# Altium PCB BCM_ECU_revA_V2.PcbDoc (part 2 of 4)
Units mm, origin at the board's own origin, x right, y up, seen from the top; angles counter-clockwise.
Board outline 170 x 110 mm, 4 copper layers (TOP SIG, GND, PWR, BOT SIG), stack 0.603 mm thick; 422 components, 413 nets, 1412 pads, 185 vias.
Unrouted connection lines stored in the file: 642.
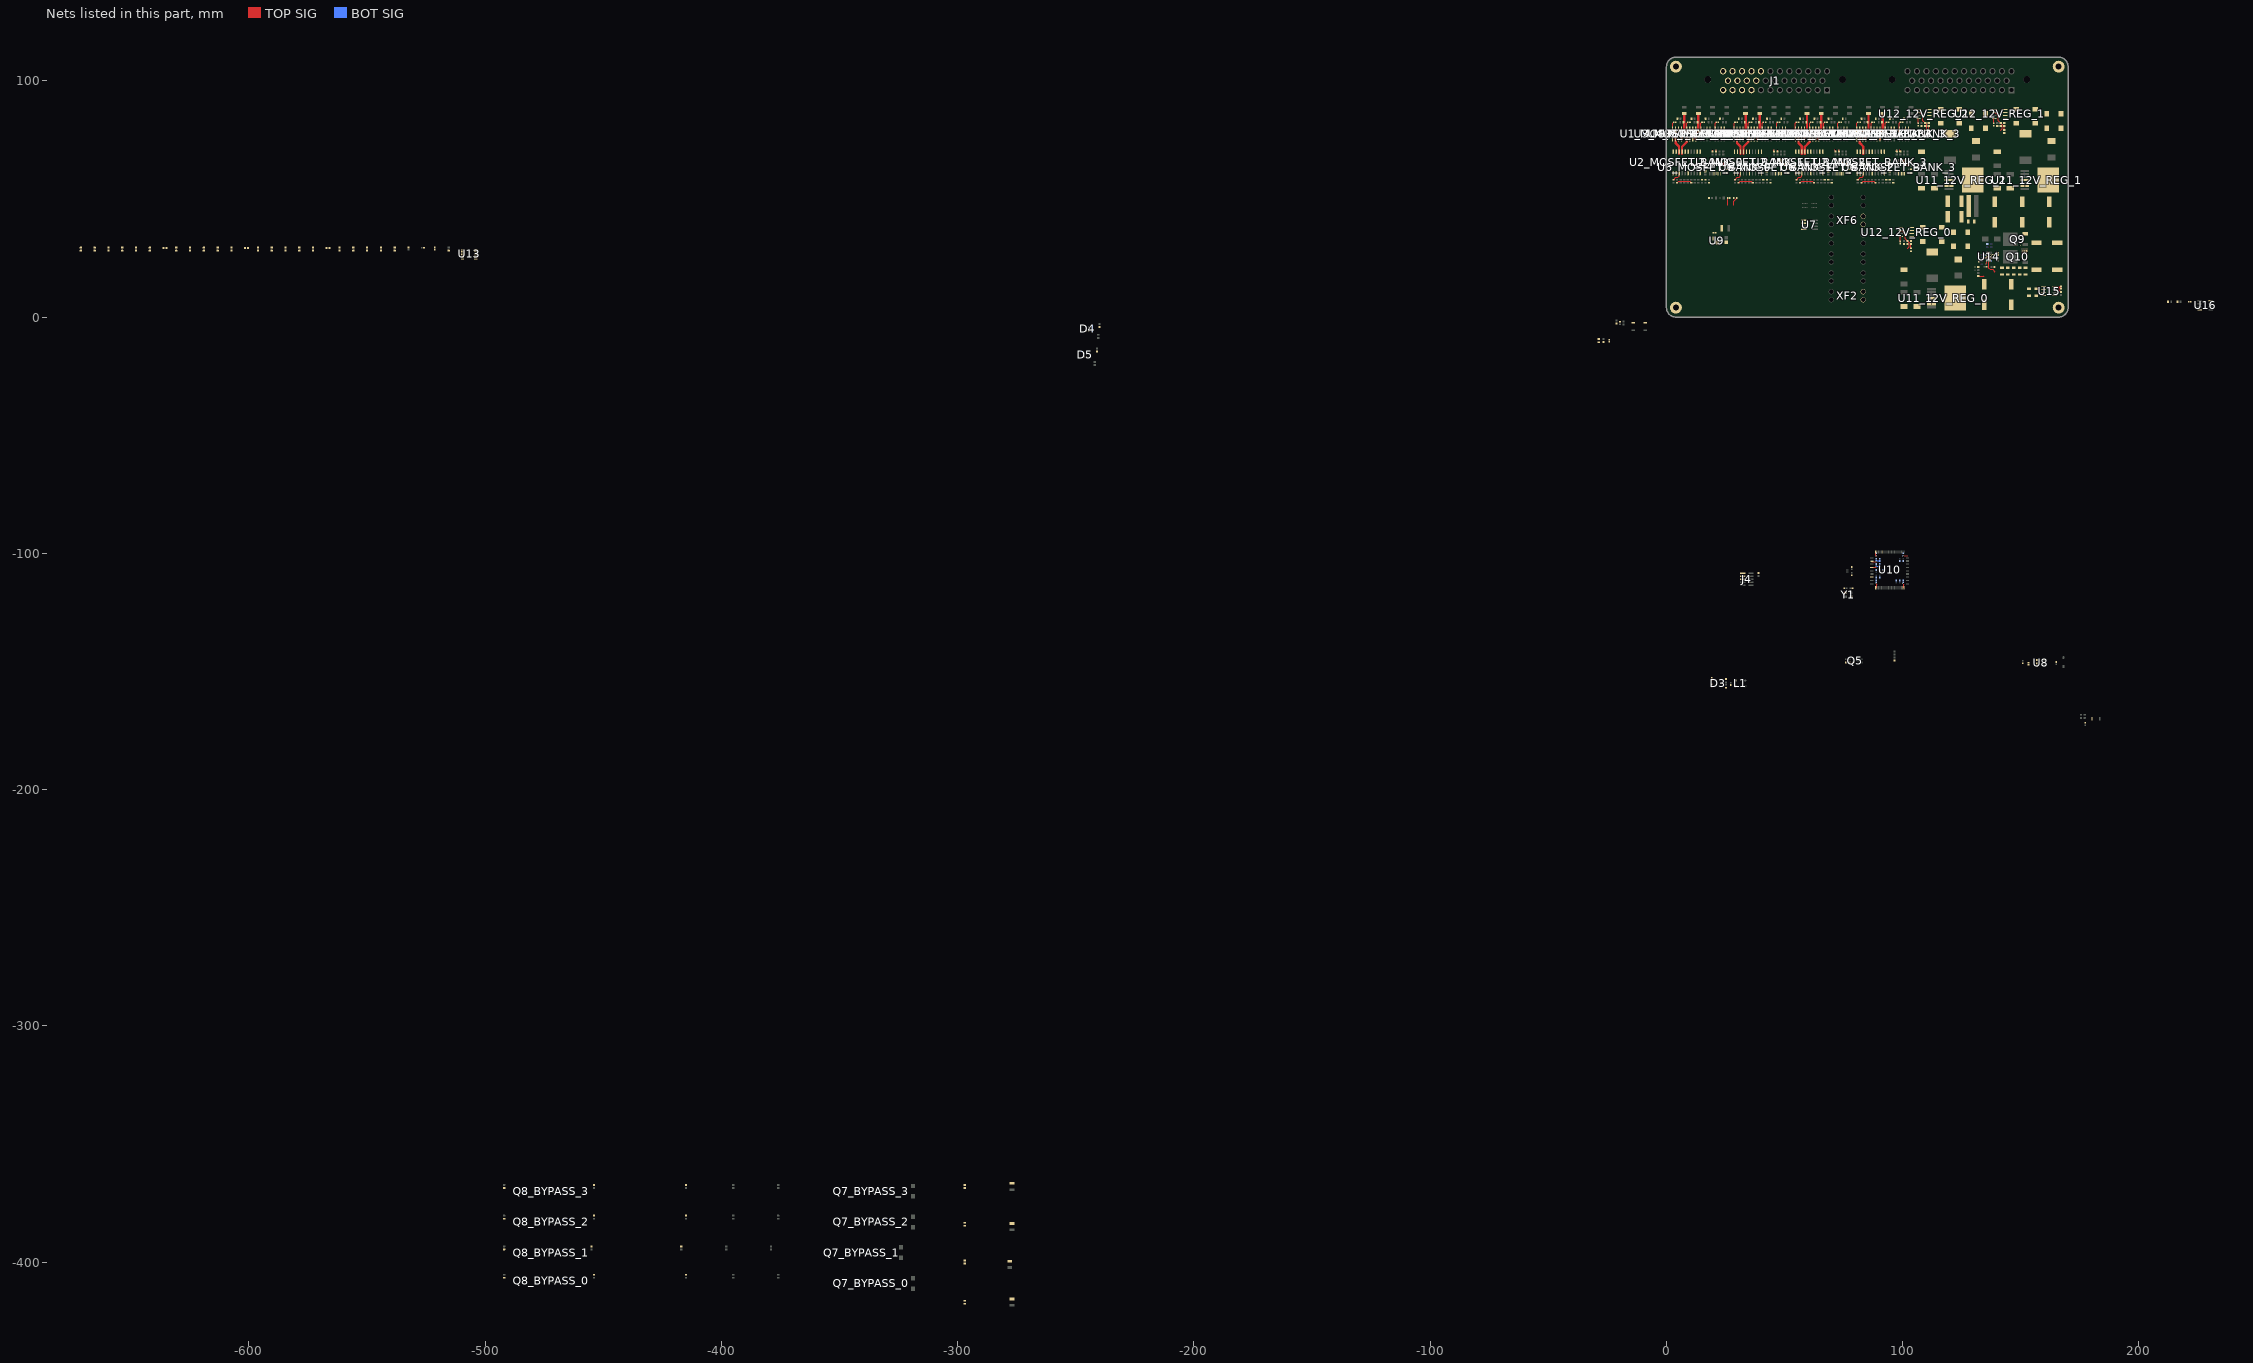
[diagram p3: the nets of this part, all layers, seen from the top]

## Footprints (in the part's own frame and the unit in brackets; to place one, negate y for a bottom-side part, rotate by r counter-clockwise, add the part's x,y. Pads: shape width x height; smd on the part's side, far side on the other; paste and mask are expansions set on the pad) (continued)
FP-SOD-123-IPC_A [mm]
  rect 1.308x0.762 smd paste+0 mask+0: 1(-1.825,0)
  rrect100% 1.308x0.762 smd paste+0 mask+0: 2(1.825,0)
  silkscreen extent -2.39,-0.8 1.35,1.01, body extent -2.98,-1.3 2.98,1.3, height 0.25
FP-SON6-P-0_50-MFG [mm]
  rect 0.3x0.45 smd paste+0 mask+0: 1(-0.5,-0.675) 2(0,-0.675) 3(0.5,-0.675) 4(0.5,0.675) 5(0,0.675) 6(-0.5,0.675)
  silkscreen extent -0.82,-1.58 0.82,0.08, body extent -0.92,-1 0.92,1, height 0.25
FP-SOT89-MFG [mm]
  rect 0.58x1.73 smd paste+0 mask+0: 1(-1.5,-1.635) 3(1.5,-1.635)
  round 1.74 smd paste+0 mask+0: 2(0,0.146)
  TOP SIG region: -0.38,-2.5 0.38,-2.5 0.38,-1 0.967,-1 0.967,2.03 -0.967,2.03 -0.967,-1 -0.38,-1 -0.38,-2.5
  silkscreen extent -2.3,-1.3 2.3,1.3, body extent -2.4,-2.6 2.4,2.13, height 0.25
FP-SOT323-3L-MFG [mm]
  rect 0.7x0.42 smd paste+0 mask+0: 1(-1,0.65) 2(-1,-0.65) 3(1,0)
  silkscreen extent -0.67,-1.1 0.67,1.1, body extent -1.45,-1.2 1.45,1.2, height 0.25
FP-SRF4532-MFG [mm]
  round 0.99 smd paste+0 mask+0: 1(-2.05,-1.25) 2(2.05,-1.25)
  round 0.97 smd paste+0 mask+0: 3(2.05,1.125) 4(-2.05,1.125)
  TOP SIG region: -2.6,0.45 -2.6,1.8 -1.5,1.8 -1.5,0.95 -1.9,0.45
  TOP SIG region: 1.5,1.8 2.6,1.8 2.6,0.45 1.9,0.45 1.5,0.95
  TOP SIG region: 1.5,-1.8 1.5,-0.95 1.9,-0.45 2.6,-0.45 2.6,-1.8
  TOP SIG region: -2.6,-1.8 -2.6,-0.45 -1.9,-0.45 -1.5,-0.95 -1.5,-1.8
  silkscreen extent -2.17,-2.47 1.12,1.7, body extent -2.7,-1.9 2.7,1.9, height 0.25
FP-SRP1265A-100M-MFG [mm]
  rect 3.1x5 smd paste+0 mask+0: 1(-5.55,0) 2(5.55,0)
  silkscreen extent -7,-6.4 7,6.4, body extent -7.2,-6.5 7.2,6.5, height 0.25
FP-T16-0236-MFG [mil]
  rect 55x90 smd paste+0 mask+0: 1(-90,-165) 3(90,-165)
  rect 224.02x243.31 smd paste+0 mask+0: 4(0,88.35)
  silkscreen extent -132,-90 132,155, body extent -136,-214 136,214, height 10
FP-T495D107K016ATE125-MFG [mm]
  rect 1.99x2.33 smd paste+0 mask+0: 1(-3.01,0) 2(3.01,0)
  silkscreen extent -3.8,-2.3 5,2.3, body extent -4.11,-2.4 4.11,2.4, height 0.25
FP-TPSE-MFG [mm]
  rect 2x3 smd paste+0 mask+0: 1(-3,0) 2(3,0)
  silkscreen extent -3.75,-2.25 4.9,2.25, body extent -4.1,-2.35 4.1,2.35, height 0.25
INF-PG-DSO-20-32_L [mm] "SOP, 20-Leads, Body 12.7x7.5mm, Pitch 1.27mm, IPC High Density"
  oval 1.95x0.6 smd: 1(-4.55,5.715) 2(-4.55,4.445) 3(-4.55,3.175) 4(-4.55,1.905) 5(-4.55,0.635) 6(-4.55,-0.635) 7(-4.55,-1.905) 8(-4.55,-3.175) 9(-4.55,-4.445) 10(-4.55,-5.715) 11(4.55,-5.715) 12(4.55,-4.445) 13(4.55,-3.175) 14(4.55,-1.905) 15(4.55,-0.635) 16(4.55,0.635) 17(4.55,1.905) 18(4.55,3.175) 19(4.55,4.445) 20(4.55,5.715)
  silkscreen extent -4.67,-6.4 3.18,6.69, body extent -3.8,-6.4 3.8,6.4, height 2.65
KSTN-3557-2 [mm] "Fuse Holder, PCB Mount, Thru-Hole, Body 19.8x6.8mm, Height 7.4mm"
  round 2.15 hole 1.8: 1(-6.75,1.7) 2(-6.75,-1.7) 3(6.75,1.7) 4(6.75,-1.7)
  silkscreen extent -9.9,-3.4 9.9,4.12, body extent -9.91,-3.37 9.91,3.37, height 7.74
KTW0007B_M [mm] "DPAK, 7-Leads, Body 9.4x10.4mm, Pitch 1.27mm, IPC Low Density"
  rrect10% 3.8x1 smd: 1(-6.35,3.81) 2(-6.35,2.54) 3(-6.35,1.27) 4(-6.35,0) 5(-6.35,-1.27) 6(-6.35,-2.54) 7(-6.35,-3.81)
  rrect1% 9.1x10.55 smd: 8(3.7,0)
  silkscreen extent -6.47,-5.2 -1.25,5.2, body extent -3.2,-5.2 6.2,5.2, height 4.65
MTC16_L [mm] "TSOP, 16-Leads, Body 5x4.4mm, Pitch 0.65mm, IPC High Density"
  oval 1.4x0.35 smd: 1(-2.8,2.275) 2(-2.8,1.625) 3(-2.8,0.975) 4(-2.8,0.325) 5(-2.8,-0.325) 6(-2.8,-0.975) 7(-2.8,-1.625) 8(-2.8,-2.275) 9(2.8,-2.275) 10(2.8,-1.625) 11(2.8,-0.975) 12(2.8,-0.325) 13(2.8,0.325) 14(2.8,0.975) 15(2.8,1.625) 16(2.8,2.275)
  silkscreen extent -2.92,-2.55 1.7,3.13, body extent -2.25,-2.55 2.25,2.55, height 1.1
ONSC-SOD-123-2-425-04_V [mm] "SOD, 2-Leads, Body 2.69x1.6mm"
  rect 0.91x1.22 smd: 1(-1.635,0) 2(1.635,0)
  silkscreen extent -1.76,-0.8 0.78,1.28, body extent -1.35,-0.8 1.35,0.8, height 1.35
ONSC-SOD-523-2-502-01_V [mm] "SOD, 2-Leads, Body 1.2x0.8mm"
  rect 0.48x0.4 smd: 1(-0.66,0) 2(0.66,0)
  silkscreen extent -0.75,-0.4 0.07,0.65, body extent -0.6,-0.4 0.6,0.4, height 0.7
QFN50P350X350X100_HS-21N [mm] "QFN, 20-Leads, Body 3.50x3.50mm, Pitch 0.50mm, Thermal Pad 2.00x2.00mm, IPC Medium Density"
  oval 1x0.25 smd: 1(-1.775,1) 2(-1.775,0.5) 3(-1.775,0) 4(-1.775,-0.5) 5(-1.775,-1) 11(1.775,-1) 12(1.775,-0.5) 13(1.775,0) 14(1.775,0.5) 15(1.775,1)
  oval 0.25x1 smd: 6(-1,-1.775) 7(-0.5,-1.775) 8(0,-1.775) 9(0.5,-1.775) 10(1,-1.775) 16(1,1.775) 17(0.5,1.775) 18(0,1.775) 19(-0.5,1.775) 20(-1,1.775)
  rect 2x2 smd: 21(0,0)
  silkscreen extent -2.6,-1.83 1.83,1.83, body extent -1.68,-1.68 1.68,1.68, height 1
R0603B [mm] "Chip Resistor, 0603, 2-Leads, Body 1.58x0.85mm, IPC Medium Density"
  rrect25% 0.8x0.95 smd: 1(-0.65,0) 2(0.65,0)
  silkscreen extent -0.2,-0.7 0.2,0.7, body extent -0.82,-0.48 0.82,0.48, height 0.5
RESC1608X90X30ML15T20 [mm] "Chip Resistor, 2-Leads, Body 1.60x0.80mm, IPC Low Density"
  rect 0.95x1.05 smd: 1(-0.7,0) 2(0.7,0)
  body extent -0.88,-0.48 0.87,0.48, height 0.9
SISH615ADN-T1-GE3-Footprint-1 [mm]
  rect 0.35x0.5 smd paste+0 mask+0: 1(-0.937,-1.4) 2(-0.288,-1.4) 3(0.363,-1.4) 4(1.012,-1.4)
  round 0.025 smd mask+0: 5-6-7-8(0.038,0.51)
  TOP SIG region: -1.187,-0.63 -1.187,-0.215 -1.568,-0.215 -1.568,0.215 -1.187,0.215 -1.187,1.35 -1.137,1.35 -1.137,1.65 -0.737,1.65 -0.737,1.35 -0.487,1.35 -0.487,1.65 -0.088,1.65 -0.088,1.35 0.163,1.35 0.163,1.65 0.563,1.65 0.563,1.35 0.813,1.35 0.813,1.65 1.212,1.65 1.212,1.35 1.262,1.35 1.262,0.215 1.643,0.215 1.643,-0.215 1.262,-0.215 1.262,-0.63
  silkscreen extent -1.51,-2.37 1.59,-1.01, body extent -1.67,-1.75 1.74,1.75, height 0.25
SK34A-LTP-Footprint-1 [mil]
  rect 74x66 smd paste+0 mask+0: 1(-87,0) 2(87,0)
  silkscreen extent -162,-63 98,63
TCAN1146DYYRQ1-Footprint-1 [mil]
  rect 38.5x12 smd paste+0 mask+0: 1(-60.75,59.07) 2(-60.75,39.38) 3(-60.75,19.69) 4(-60.75,0) 5(-60.75,-19.69) 6(-60.75,-39.38) 7(-60.75,-59.07) 8(60.75,-59.07) 9(60.75,-39.38) 10(60.75,-19.69) 11(60.75,0) 12(60.75,19.69) 13(60.75,39.38) 14(60.75,59.07)
  silkscreen extent -46,-90 100,90, body extent -66,-84 66,84, height 43
WE-HCI_7040 [mm] "SMT Flat Wire High Current Inductor, body 6.9x6.9mm"
  rect 2.2x2.7 smd: 1(0,2.55) 2(0,-2.55)
  silkscreen extent -3.6,-3.6 3.6,3.6, body extent -3.45,-3.5 3.45,3.5, height 4
WL-SBCD_0606 [mm] "SMT Bi-color Chip LED Diffuesed, body 1.5x1.6mm"
  rect 0.5x0.8 smd: 1(-0.45,0.8) 2(-0.45,-0.8) 3(0.45,-0.8) 4(0.45,0.8)
  silkscreen extent -0.07,1.48 0.08,1.62, body extent -0.75,-0.8 0.75,0.8, height 0.55

## Part data
C1_MOSFET_BANK_0 C1_MOSFET_BANK_1 C1_MOSFET_BANK_2 C1_MOSFET_BANK_3 C2_MOSFET_BANK_0 C2_MOSFET_BANK_1 C2_MOSFET_BANK_2 C2_MOSFET_BANK_3 C3_MOSFET_BANK_0 C3_MOSFET_BANK_1 C3_MOSFET_BANK_2 C3_MOSFET_BANK_3 C4_MOSFET_BANK_0 C4_MOSFET_BANK_1 C4_MOSFET_BANK_2 C4_MOSFET_BANK_3 C5_MOSFET_BANK_0 C5_MOSFET_BANK_1 C5_MOSFET_BANK_2 C5_MOSFET_BANK_3 C6_MOSFET_BANK_0 C6_MOSFET_BANK_1 C6_MOSFET_BANK_2 C6_MOSFET_BANK_3 C7_MOSFET_BANK_0 C7_MOSFET_BANK_1 C7_MOSFET_BANK_2 C7_MOSFET_BANK_3 C8 C9 C10 C11 C12 C13 C14 C16 C17 C18 C19 C20 C21 C22 C23 C24 C25 C26 C27 C28 C29 C30 C31 C32 C33 C34 C35 C36 C37 C38 C39 C47_12V_REG_0 C47_12V_REG_1 C47_12V_REG_2 C48_12V_REG_0 C48_12V_REG_1 C48_12V_REG_2 C49 C50 C51 C66 C67 C71 C72 C73 C74 C75 C76 C77: library part CMP-001-00058-1, "LARGE PADS, 0402 CAP, CHANGE COMMENT TO MATCH REAL P/N", Capacitor Type=Ceramic, Case/Package=0402, Max Operating Temperature=85°C, Min Operating Temperature=-55°C, Mounting Technology="Surface Mount", Pins=2, RoHS Compliant=Yes
C15: library part CMP-1036-04819-2, Manufacturer=Kemet, Part Number=C0805C225K9PACTU
C40_12V_REG_0 C40_12V_REG_1 C40_12V_REG_2 C41_12V_REG_0 C41_12V_REG_1 C41_12V_REG_2 C42_12V_REG_0 C42_12V_REG_1 C42_12V_REG_2: library part CMP-04424-000178-1, "CAP TANT 68UF 10% 25V 2917", Capacitance=68uF, Case Code (Imperial)=2917, Case Code (Metric)=7343, Dielectric Material=Tantalum, ESR (Equivalent Series Resistance)=125mR, Leakage Current=17uA, Max Operating Temperature=125°C, Min Operating Temperature=-55°C, Package Quantity=1, Ripple Current=460uA, Tolerance=10%, Voltage=25V, Case/Package=2917, Depth=4.3mm, Dissipation Factor=6%, Features="General Purpose", Height=4.1mm, Height - Seated (Max)=0.169inch, Lead Free="Lead Free", Length=7.3mm, Mount="Surface Mount", Number of Pins=2, Packaging="Tape and Reel", Polarity=Polar, Radiation Hardening=No, REACH SVHC="No SVHC", RoHS Compliant=Yes, Series=TPS, Termination=SMD/SMT, Voltage Rating=25V, Voltage Rating (DC)=25V, Width=4.3mm
C43_12V_REG_0 C43_12V_REG_1 C43_12V_REG_2 C44_12V_REG_0 C44_12V_REG_1 C44_12V_REG_2 C45_12V_REG_0 C45_12V_REG_1 C45_12V_REG_2 C46_12V_REG_0 C46_12V_REG_1 C46_12V_REG_2: library part CMP-2000-07207-2, "CAP TANT 100UF 10% 16V 2917", Capacitance=100uF, Case Code (Imperial)=2917, Case Code (Metric)=7343, Dielectric Material=Tantalum, ESR (Equivalent Series Resistance)=125mR, Max Operating Temperature=125°C, Min Operating Temperature=-55°C, Package Quantity=1, Tolerance=10%, Voltage=16V, Case/Package=2917, Construction=Flat, Depth=4.3mm, Dissipation Factor=8%, Failure Rate=0.001%, Features="General Purpose", Height=2.8mm, Height - Seated (Max)=0.122inch, Length=7.3mm, Life (Hours)=2000Hour, Mount="Surface Mount", Number of Pins=2, Packaging="Tape and Reel", Polarity=Polar, Radiation Hardening=No, REACH SVHC="No SVHC", RoHS Compliant=Yes, Series=T495, Termination=SMD/SMT, Voltage Rating=16V, Voltage Rating (DC)=16V, Weight=0.023634oz, Width=0.169inch
C52 C53 C54 C55 C56 C57 C58: library part CMP-05428-000631-1, "Conductive Polymer Aluminum Solid Capacitors (OS-CON) 68uF ±20% 50V RADIAL SMT 10x12.6mm", Capacitance=68uF, Case/Package=Radial, ESR (Equivalent Series Resistance)=20mR, Leakage Current=680uA, Max Operating Temperature=105°C, Min Operating Temperature=-55°C, Package Quantity=400, Ripple Current=4.3A, Tolerance=20%, Voltage=50V, Construction=Cylindrical, Diameter=10mm, Dissipation Factor=12%, Height=12.6mm, Height - Seated (Max)=0.5inch, Lead Free="Lead Free", Length=12.6mm, Life (Hours)=5000Hour, Mount="Surface Mount", Number of Pins=12, Packaging="Tape and Reel", Polarity=Polar, REACH SVHC="No SVHC", Ripple Current (AC)=4.3A, RoHS Compliant=Yes, Series="OS-CON™, SVPF", Termination=SMD/SMT, Voltage Rating=50V, Voltage Rating (DC)=50V
C59 C60 C61 C62 C63 C64 C65: library part CMP-2000-05256-2, "CAP CER 10UF 50V X5R 1206", Capacitance=10uF, Manufacturer="Murata Electronics North America", Package=GRM31-0.2, Temperature="-55°C to +85°C", Temperature Characteristic=X5R, Temperature Coefficient=15%, Temperature Range High=+85°C, Temperature Range Low=-55°C, Tolerance=10%, Voltage Rating=50V, Automotive=No, Category=Cap, ComponentLink2Description=Datasheet, ComponentLink2URL=https://search.murata.co.jp/Ceramy/image/img/A01X/G101/ENG/GRM31CR61H106KA12-01A.pdf, Device Class L1="Passive Components", Device Class L2=Capacitors, Device Class L3="Ceramic Capacitors", Digikey Description="CAP CER 10UF 50V X5R 1206", Height=1.8mm, Lead Free=Yes, Manufacturer Part Number=GRM31CR61H106KA12L, Material=Ceramic, Mouser Description="Multilayer Ceramic Capacitors MLCC - SMD/SMT 1206 10uF 50volt X5R +/-10%", Octopart=https://octopart.com/grm31cr61h106ka12l-murata-18903335, RoHS=TRUE
C68: library part CMP-2000-06011-1, "Chip Capacitor, 1 uF, +/- 10%, 50 V, -55 to 125 degC, 1206 (3216 Metric), RoHS, Tape and Reel", Capacitance=1uF, Capacitance - nF=1000nF, Case Code - in=1206, Case Code - mm=3216, Case Height=1mm, Case Length=3.2mm, Case Width=1.6mm, Dielectric=X7R, Manufacturer=Kemet, Maximum Operating Temperature=+125C, Minimum Operating Temperature=-55C, Operating Temperature Range=-55Cto+125C, Package / Case=1206(3216metric), Package Description="2-Pin Surface Mount Device, Body 3.2 x 1.6 mm", Temperature Coefficient / Code=+/-15%, Tolerance=10%, Voltage Rating=50V, Brand=Kemet, Class=Class1, Datasheet URL=http://www.kemet.com/docfinder?Partnumber=C1206C105K5RACTU, Datasheet Version=02/2016, Dimensions=1.6mmWx3.2mmLx1mmH, Factory Pack Quantity=2500, Manufacturer URL=http://www.kemet.com/, Mounting Technology=SurfaceMount, Package Reference=1206, Packaging=Reel, Product=GeneralTypeMLCCs, Product Category=MultilayerCeramicCapacitorsMLCC-SMD/SMT, RoHS=Details, Series=C1206C, Termination Style=SMD/SMT, Type=SMDMLCCX7R6.3-250VDCCommericalGrade, Voltage Rating DC=50V
C69 C70: library part CMP-08246-005087-1, "CAP CER 22UF 50V X5R SMD", Capacitance=22uF, Case Code (Imperial)=2220, Case Code (Metric)=5750, Case/Package=Ceramic, Dielectric=X5R, Max Operating Temperature=85°C, Min Operating Temperature=-55°C, Package Quantity=1, Tolerance=20%, Voltage=50V, Depth=5mm, Height=5mm, Lead Free="Lead Free", Lead/Base Style=L-Lead, Length=6mm, Mount="Surface Mount", Number of Pins=2, Packaging="Tape and Reel", Radiation Hardening=No, REACH SVHC="No SVHC", Resistor Type=Ceramic, RoHS Compliant=Yes, Series=CKG, Termination=Metal, Thickness=0.217inch, Voltage Rating=50V, Voltage Rating (DC)=50V, Width=5mm
D1: library part CMP-1060-00565-1, "Zener Voltage Regulator, 500 mW, 2-Pin SOD-123, Pb-Free, Tape and Reel", Manufacturer="On Semiconductor", ComponentLink1Description="Manufacturer URL", ComponentLink1URL=http://www.onsemi.com/, ComponentLink2Description=Datasheet, ComponentLink2URL=http://www.onsemi.com/pub_link/Collateral/MMSZ5221BT1-D.PDF, ComponentLink3Description="Package Specification", ComponentLink3URL=http://www.onsemi.com/pub_link/Collateral/425-04.PDF, DatasheetVersion="Rev. 12", Mounting Technology="Surface Mount", P Max (W)=0.5, PackageDescription="2-Pin SOD, Body 1.6 x 2.69 mm", PackageReference=SOD-123-2-425-04, PackageVersion="Rev. G, 10/2009", Packing="Tape and Reel", PartNumber=MMSZ5242BT1G, RoHS=Pb-Free, VZ Typ (V)=12
D2: library part CMP-2000-04993-2, "DIODE GEN PURP 100V 150MA SOD123", Average Rectified Current=150mA, Capacitance=4pF, Forward Voltage=1V, Max Forward Surge Current (Ifsm)=1A, Max Operating Temperature=150°C, Max Repetitive Reverse Voltage (Vrrm)=100V, Max Reverse Leakage Current=5uA, Max Surge Current=2A, Min Operating Temperature=-65°C, Package Quantity=3000, Power Dissipation=400mW, Current Rating=150mA, Element Configuration=Single, Forward Current=150mA, Height=1.2mm, Lead Free="Lead Free", Length=2.85mm, Max Reverse Voltage (DC)=100V, Mount="Surface Mount", Number of Pins=2, Output Current=150mA, Packaging="Tape and Reel", Peak Non-Repetitive Surge Current=2A, Polarity=Standard, Radiation Hardening=No, Recovery Time=4ns, Reverse Recovery Time=4ns, Voltage Rating (DC)=100V, Width=1.8mm
D3: library part CMP-12225-000055-1, "TVS DIODE 26.5V 44V SOT323-3", Breakdown Voltage=28.5V, Capacitance=3pF, Clamping Voltage=44V, Manufacturer=STMicroelectronics, Max Junction Temp=+175°C, Package=SOT323-3L, Peak Pulse Current=3A, Peak Pulse Power=170W, Reverse Standoff Voltage=26.5V, Temperature="-55°C to +175°C", Temperature Range Low=-55°C, Automotive=Yes, Automotive Grade="Grade 0", Category=Diode, ComponentLink2Description=Datasheet, ComponentLink2URL=https://www.st.com/resource/en/datasheet/esdcan02-2bwy.pdf, Device Class L1="Circuit Protection", Device Class L2="TVS Diodes", Device Class L3=unset, Digikey Description="TVS DIODE 26.5V 44V SOT323-3", Direction=Bidirectional, Height=1.1mm, Ipc Land Pattern Name=SOT65P210X95-3, Lead Free=Yes, Manufacturer Part Number=ESDCAN02-2BWY, Mouser Description="TVS Diodes / ESD Suppressors Automotive dual-line Transil, Transient voltage suppressor (TVS) for CAN bus", Number Of Channels=2, Octopart=https://octopart.com/esdcan02-2bwy-stmicroelectronics-58631133, RoHS=TRUE, Standoff Height=0mm, Temperature Range High=+175°C
D4 D5: library part CMP-004-00040-2, "Led, Red/Grn, 180Mcd/230Mcd, 624Nm/525Nm Rohs Compliant: Yes", Component Type=Standard, Design Item ID=CMP-004-00034-2, Pins=4, Source=rgled.SchLib
D6_12V_REG_0 D6_12V_REG_1 D6_12V_REG_2: library part CMP-2000-05097-3, "DIODE SCHOTTKY 40V 5A SMC", Capacitance=300pF, Forward Current=5A, Manufacturer="Diodes Inc.", Max Junction Temp=+150°C, Max Repetitive Reverse Voltage=40V, Max Surge Forward Current=100A, Package=SMC, Peak Reverse Current=0.5mA, Temperature="-55°C to +150°C", Temperature Range Low=-55°C, Automotive=No, Automotive Grade=NA, Category=Diode, ComponentLink2Description=Datasheet, ComponentLink2URL=https://www.diodes.com/assets/Datasheets/ds13012.pdf, Device Class L1="Discrete Semiconductors", Device Class L2=Diodes, Device Class L3="Schottky Diodes", Digikey Description="DIODE SCHOTTKY 40V 5A SMC", Footprint Url=https://www.diodes.com/assets/Package-Files/SMC.pdf, Height=2.5mm, Lead Free=Yes, Manufacturer Part Number=B540C-13-F, Mouser Description="Diode: Schottky rectifying; SMD; 40V; 5A; SMC; Package: reel, tape", Octopart=https://octopart.com/b540c-13-f-diodes+inc.-325873, Reverse Voltage=40V, RoHS=TRUE, Standoff Height=0.1mm, Temperature Range High=+150°C
D7_BYPASS_0 D7_BYPASS_1 D7_BYPASS_2 D7_BYPASS_3: library part CMP-004-00058-2, "Rectifier Diode, Schottky, 1 Phase, 1 Element, 3A, 40V V(RRM), Silicon, DO-214AC", Forward Voltage=500mV, Max Operating Temperature=125°C, Pins=2, RoHS Compliant=Yes
D8: library part CMP-1060-00750-1, "Zener Voltage Regulator, 500 mW, 2-Pin SOD-523, Pb-Free, Tape and Reel", Manufacturer="On Semiconductor", ComponentLink1Description="Manufacturer URL", ComponentLink1URL=http://www.onsemi.com/, ComponentLink2Description=Datasheet, ComponentLink2URL=http://www.onsemi.cn/pub_link/Collateral/MM5Z2V4T1-D.PDF, ComponentLink3Description="Package Specification", ComponentLink3URL=http://www.onsemi.com/pub_link/Collateral/502-01.PDF, DatasheetVersion="Rev. 10", Mounting Technology="Surface Mount", P Max (W)=0.5, PackageDescription="2-Pin SOD, Body 1.2 x 0.8 mm", PackageReference=SOD-523-2-502-01, PackageVersion="Rev. E, 09/2010", Packing="Tape and Reel", PartNumber=MM5Z3V3T1G, RoHS=Pb-Free, VZ Typ (V)=3.3
F1: library part CMP-005-00028-2, "PTC Thermistor", RoHS Compliant=Yes
F2_MOSFET_BANK_0 F2_MOSFET_BANK_1 F2_MOSFET_BANK_2 F2_MOSFET_BANK_3 F3_MOSFET_BANK_0 F3_MOSFET_BANK_1 F3_MOSFET_BANK_2 F3_MOSFET_BANK_3 F4_MOSFET_BANK_0 F4_MOSFET_BANK_1 F4_MOSFET_BANK_2 F4_MOSFET_BANK_3 F5_MOSFET_BANK_0 F5_MOSFET_BANK_1 F5_MOSFET_BANK_2 F5_MOSFET_BANK_3 F6_BYPASS_0 F6_BYPASS_1 F6_BYPASS_2 F6_BYPASS_3: library part CMP-08605-000054-1, "FUSE BOARD MNT 3A 32VAC/VDC 1206", Fuse Current=3A, Fuse Interrupt Ac Current=50A, Fuse Voltage Drop=75.99mV, Manufacturer=Littelfuse, Max Fuse Ac Voltage=32V, Package=0466, Resistance=0.019Ω, Temperature="-55°C to +90°C", Temperature Range High=+90°C, Temperature Range Low=-55°C, Automotive=No, Category=Fuse, ComponentLink2Description=Datasheet, ComponentLink2URL=https://www.littelfuse.com/~/media/electronics/datasheets/fuses/littelfuse_fuse_466_datasheet.pdf.pdf, Device Class L1="Circuit Protection", Device Class L2=Fuses, Device Class L3=unset, Digikey Description="FUSE BOARD MNT 3A 32VAC/VDC 1206", Fuse Blow Speed=Fast, Fuse I2T=0.576A2Sec, Fuse Interrupt Dc Current=50A, Height=0.66mm, Lead Free=Yes, Manufacturer Part Number=0466003.NR, Max Fuse Dc Voltage=32V, Mouser Description="Surface Mount Fuses 32V 3A VFA Slimline", Octopart=https://octopart.com/0466003.nr-littelfuse-565175, RoHS=TRUE, Voltage Rating=32V
FB1: library part CMP-0686-00252-4, "Chip Ferrite Bead, 0402, 600Ω @ 100MHz, 0.23Ω, 25%, 900mA", Case Code (Imperial)=0402, Case Code (Metric)=1005, Current Rating=900mA, DC Resistance (DCR)=230mR, Max Operating Temperature=125°C, Min Operating Temperature=-55°C, Package Quantity=10000, Test Frequency=100MHz, Tolerance=25%, Case/Package=0402, Height=0.5mm, Impedance=600R, Lead Free="Lead Free", Length=1mm, Material=Steel, Max Current Rating=900mA, Max DC Current=900mA, Number of Circuits=1, Number of Lines=1, Number of Pins=2, Packaging="Tape and Reel", Termination=SMD/SMT, Width=0.5mm
J1 J2: library part CMP-03369-000154-1, "CONN HEADER R/A 35POS 4MM", Color=Black, Current Rating=17A, Flammability Rating="UL94 V-0", Max Operating Temperature=221°C, Max Voltage Rating (AC)=250V, Min Operating Temperature=-40°C, Package Quantity=1, Circuit Application=Power, Connector System=Wire-to-Device, Connector Type="Male Pin", Contact Material=Brass, Contact Plating=Tin, Contact Type="Male Pin", Depth=37.9mm, ELV=Compliant, Fastening Type=Ramp, Gender=Male, Height=32.1mm, Housing Material=Thermoplastic, Insulation=Insulated, Lead Free="Lead Free", Length=3.03inch, Mount="Through Hole", Number of Contacts=35, Number of Positions=35, Number of Rows=3, Number of Signal Positions=35, Orientation="Right Angle", Packaging=Bulk, PCB Mount Alignment="Yes (With)", PCB Mount Retention=With, PCB Thickness=0.062inch, Pitch=0.157inch, Primary Type=Rectangular, Radiation Hardening=No, RoHS Compliant=Yes, Row Spacing=0.157inch, Sealable="Yes (With)", Series=Ampseal, Shielding=Unshielded, Tab Thickness=1.3mm, Termination=Solder, Width=37.9mm
J4: library part CMP-001-0013-3, "CONN HEADER SMD 10POS 1.27MM"
L1: library part CMP-07251-000006-1, "CMC 51UH 200MA 2LN 2KOHM SMD", Case/Package=4532, Current=200mA, DC Resistance (DCR)=3.5R, Inductance=51uH, Insulation Resistance=10MR, Max Operating Temperature=125°C, Min Operating Temperature=-40°C, Package Quantity=1, Resistance=2kR, Self Resonant Frequency=100kHz, Tolerance=50%, Voltage Rating (DC)=50V, Contact Plating=Tin, Core Material=Ferrite, Current Rating=200mA, DC Current=200mA, Depth=3.4mm, Element Configuration=Dual, Height=0.118inch, Impedance=2kR, Lead Free="Lead Free", Length=4.5mm, Material=Steel, Max DC Current=200mA, Mount="Surface Mount", Number of Lines=2, Packaging="Tape and Reel", REACH SVHC="No SVHC", RoHS Compliant=Yes, Series=SRF4532, Termination=SMD/SMT, Test Frequency=100kHz, Width=0.126inch
L2_12V_REG_0 L2_12V_REG_1 L2_12V_REG_2: library part CMP-07248-000069-1, "FIXED IND 10UH 10A 16.5 MOHM SMD", Case/Package=Nonstandard, Current Rating=10A, DC Resistance (DCR)=16.5mR, Inductance=10uH, Inductance Tolerance=20%, Max Operating Temperature=150°C, Min Operating Temperature=-40°C, Package Quantity=500, Ratings=AEC-Q200, Resistor Type=Wirewound, Saturation Current=15.5A, Self Resonant Frequency=10MHz, Test Frequency=100kHz, Core Material="Carbonyl Powder", Depth=12.5mm, Height=6.2mm, Height - Seated (Max)=0.252inch, Length=13.5mm, Max DC Current=10A, Mount="Surface Mount", Packaging="Cut Tape", Q Factor=20, REACH SVHC="No SVHC", RMS Current (Irms)=10A, RoHS Compliant=Yes, Shielding=Shielded, Termination=SMD/SMT, Tolerance=20%, Width=0.492inch
L3: library part CMP-0226-00067-2, Ambient Temperature Range High=100°C, Ambient Temperature Range Low=-40°C, Case/Package=Nonstandard, Current Rating=15A, DC Resistance (DCR)=4.6mΩ, Inductance=1µH, Inductance Tolerance=20%, Max Operating Temperature=150°C, Saturation Current=19A, Self Resonant Frequency=85MHz, Series Resistance=4.6Ω, Test Frequency=100kHz, Composition=Wirewound, Height=3.8mm, Height - Seated (Max)=3.9878mm, Length=7mm, Max DC Current=15A, Min Operating Temperature=-40°C, Mount="Surface Mount", NexarPartId=20056790, Number of Pins=2, Packaging=Digi-Reel®, REACH SVHC=Unknown, RMS Current (Irms)=15A, RoHS=Compliant, Shielding=Shielded, Termination=SMD/SMT, Tolerance=20%, Width=6.9mm
Q1 Q2 Q3 Q4 Q7_BYPASS_0 Q7_BYPASS_1 Q7_BYPASS_2 Q7_BYPASS_3: library part CMP-013-00018-2, "Trans MOSFET P-CH 20V 22.1A 8-Pin PowerPAK 1212 EP T/R", Component Type=Standard, Design Item ID=CMP-013-00036-4, Pins=5, Source=SISH615ADN-T1-GE3.SchLib
Q5: library part CMP-2000-05968-1, "N-Channel Enhancement Mode Mosfet, 50 V, 200 mA, -55 to 150 degC, 6-Pin SOT-323, RoHS, Tape and Reel", Id - Continuous Drain Current=200mA, Manufacturer=DiodesIncorporated, Maximum Operating Temperature=+150C, Minimum Operating Temperature=-55C, Package / Case=SOT-323-3, Package Description="3-Pin Small Outline Transistor, Body 2 x 1.25 mm, Pitch 0.65 mm", Package Reference=SOT323, Pd - Power Dissipation=200mW, Rds On - Drain-Source Resistance=1.4Ohms, Vds - Drain-Source Breakdown Voltage=75V, Vgs - Gate-Source Voltage=20V, Brand=DiodesIncorporated, Channel Mode=Enhancement, Configuration=Single, Datasheet URL=http://www.diodes.com/_files/datasheets/ds30206.pdf, Datasheet Version="Rev. 11-2, 09/2013", Factory Pack Quantity=3000, Forward Transconductance - Min=0.1S, Height=1mm, Length=2.2mm, Manufacturer URL=http://www.diodes.com/, Mounting Style=SMD/SMT, Mounting Technology=SurfaceMount, Number Of Channels=1Channel, Packaging=Reel, Product=MOSFETSmallSignal, Product Category=MOSFET, RoHS=True, Series=BSS138, Technology=Si, Transistor Polarity=N-Channel, Transistor Type=1N-Channel, Type=EnhancementModeFieldEffectTransistor, Typical Turn-Off Delay Time=20ns, Typical Turn-On Delay Time=20ns, Unit Weight=0.000212oz, Width=1.35mm
Q8_BYPASS_0 Q8_BYPASS_1 Q8_BYPASS_2 Q8_BYPASS_3: library part CMP-35916-000023-1, "SMALL-SIGNAL MOSFET 2 IN 1 NCH +"
Q9 Q10: library part CMP-02550-000179-1, "MOSFET N-CH 150V 42A TO252AA", Continuous Drain Current=42A, Drain To Source Breakdown Voltage=150V, Drain To Source Resistance=0.0372Ω, Gate To Source Voltage=20V, Input Capacitace At Vds="560pF @ 50V", Manufacturer=Vishay, Max Forward Diode Voltage=1.5V, Max Junction Temp=+175°C, Package=T16-0236, Power Dissipation=65.2W, Pulse Drain Current=40A, Temperature="-55°C to +175°C", Temperature Range Low=-55°C, Typ Forward Diode Voltage=0.85V, Automotive=No, Category=Trans, ComponentLink2Description=Datasheet, ComponentLink2URL=https://www.vishay.com/docs/76248/sud80460e.pdf, Depletion Mode=False, Device Class L1="Discrete Semiconductors", Device Class L2=Transistors, Device Class L3=MOSFETs, Digikey Description="MOSFET N-CH 150V 42A TO252AA", Drain To Source Voltage=150V, Footprint Url=https://www.vishay.com/docs/71197/to252aa.pdf, Gate Charge At Vgs="10.5nC @ 10V", Height=2.507mm, Lead Free=Yes, Manufacturer Part Number=SUD80460E-GE3, Number Of Channels=1, Number Of N Channels=1, Octopart=https://octopart.com/sud80460e-ge3-vishay-78440626, Reverse Recovery Charge=210nC, Reverse Recovery Time=68ns, RoHS=TRUE, Rthja Max=50°C/W, Temperature Range High=+175°C, Threshold Vgs Max=4V, Threshold Vgs Min=2V, Transconductance=11S, Turn Off Delay Time=15ns, Turn On Delay Time=8ns
R1_MOSFET_BANK_0 R1_MOSFET_BANK_1 R1_MOSFET_BANK_2 R1_MOSFET_BANK_3 R2_MOSFET_BANK_0 R2_MOSFET_BANK_1 R2_MOSFET_BANK_2 R2_MOSFET_BANK_3 R3_MOSFET_BANK_0 R3_MOSFET_BANK_1 R3_MOSFET_BANK_2 R3_MOSFET_BANK_3 R4_MOSFET_BANK_0 R4_MOSFET_BANK_1 R4_MOSFET_BANK_2 R4_MOSFET_BANK_3 R5_MOSFET_BANK_0 R5_MOSFET_BANK_1 R5_MOSFET_BANK_2 R5_MOSFET_BANK_3 R6_MOSFET_BANK_0 R6_MOSFET_BANK_1 R6_MOSFET_BANK_2 R6_MOSFET_BANK_3 R7_MOSFET_BANK_0 R7_MOSFET_BANK_1 R7_MOSFET_BANK_2 R7_MOSFET_BANK_3 R8_MOSFET_BANK_0 R8_MOSFET_BANK_1 R8_MOSFET_BANK_2 R8_MOSFET_BANK_3 R9_MOSFET_BANK_0 R9_MOSFET_BANK_1 R9_MOSFET_BANK_2 R9_MOSFET_BANK_3 R10_MOSFET_BANK_0 R10_MOSFET_BANK_1 R10_MOSFET_BANK_2 R10_MOSFET_BANK_3 R12_MOSFET_BANK_0 R12_MOSFET_BANK_1 R12_MOSFET_BANK_2 R12_MOSFET_BANK_3 R13_MOSFET_BANK_0 R13_MOSFET_BANK_1 R13_MOSFET_BANK_2 R13_MOSFET_BANK_3 R14_MOSFET_BANK_0 R14_MOSFET_BANK_1 R14_MOSFET_BANK_2 R14_MOSFET_BANK_3 R15_MOSFET_BANK_0 R15_MOSFET_BANK_1 R15_MOSFET_BANK_2 R15_MOSFET_BANK_3 R16_MOSFET_BANK_0 R16_MOSFET_BANK_1 R16_MOSFET_BANK_2 R16_MOSFET_BANK_3 R17_MOSFET_BANK_0 R17_MOSFET_BANK_1 R17_MOSFET_BANK_2 R17_MOSFET_BANK_3 R18_MOSFET_BANK_0 R18_MOSFET_BANK_1 R18_MOSFET_BANK_2 R18_MOSFET_BANK_3 R19_MOSFET_BANK_0 R19_MOSFET_BANK_1 R19_MOSFET_BANK_2 R19_MOSFET_BANK_3 R20_MOSFET_BANK_0 R20_MOSFET_BANK_1 R20_MOSFET_BANK_2 R20_MOSFET_BANK_3 R21_MOSFET_BANK_0 R21_MOSFET_BANK_1 R21_MOSFET_BANK_2 R21_MOSFET_BANK_3 R22_MOSFET_BANK_0 R22_MOSFET_BANK_1 R22_MOSFET_BANK_2 R22_MOSFET_BANK_3 R23_MOSFET_BANK_0 R23_MOSFET_BANK_1 R23_MOSFET_BANK_2 R23_MOSFET_BANK_3 R24_MOSFET_BANK_0 R24_MOSFET_BANK_1 R24_MOSFET_BANK_2 R24_MOSFET_BANK_3 R25_MOSFET_BANK_0 R25_MOSFET_BANK_1 R25_MOSFET_BANK_2 R25_MOSFET_BANK_3 R26 R27 R28 R29 R30 R31 R32 R33 R34 R35 R36 R37 R38 R39 R40 R41 R42 R43 R44 R45 R46 R47_12V_REG_0 R47_12V_REG_1 R47_12V_REG_2 R48_12V_REG_0 R48_12V_REG_1 R48_12V_REG_2 R49_12V_REG_0 R49_12V_REG_1 R49_12V_REG_2 R50_12V_REG_0 R50_12V_REG_1 R50_12V_REG_2 R51_12V_REG_0 R51_12V_REG_1 R51_12V_REG_2 R52_12V_REG_0 R52_12V_REG_1 R52_12V_REG_2 R53 R54_BYPASS_0 R54_BYPASS_1 R54_BYPASS_2 R54_BYPASS_3 R55_BYPASS_0 R55_BYPASS_1 R55_BYPASS_2 R55_BYPASS_3 R56_BYPASS_0 R56_BYPASS_1 R56_BYPASS_2 R56_BYPASS_3 R57_BYPASS_0 R57_BYPASS_1 R57_BYPASS_2 R57_BYPASS_3 R58_BYPASS_0 R58_BYPASS_1 R58_BYPASS_2 R58_BYPASS_3 R59_BYPASS_0 R59_BYPASS_1 R59_BYPASS_2 R59_BYPASS_3 R60 R61 R62 R63 R64 R65 R66 R67 R68 R69 R70 R71 R72 R73 R74 R75 R76 R77 R78 R79 R80 R81 R82 R83 R84 R86 R87 R88 R89 R90 R91 R92 R93 R94: library part CMP-009-00002-14, "Resistor"
R11_MOSFET_BANK_0 R11_MOSFET_BANK_1 R11_MOSFET_BANK_2 R11_MOSFET_BANK_3: library part CMP-2000-00869-1, Manufacturer=Panasonic, Part Number=ERT-J1VR103J
R85: library part CMP-33361-000028-1, "RES 0.001 OHM 4W 3518 WIDE", Case Code (Imperial)=3518, Case Code (Metric)=9045, Max Operating Temperature=155°C, Max Power Dissipation=4W, Min Operating Temperature=-55°C, Package Quantity=1, Resistance=1mR, Resistance Tolerance=5%, Resistor Type="Metal Foil", Temperature Coefficient=150ppm/°C, Case/Package=9045, Depth=4.5mm, Features="Moisture Resistant", Height=0.028inch, Length=0.177inch, Mount="Surface Mount", Number of Pins=2, Number of Terminations=2, Packaging="Tape and Reel", Power Rating=4W, RoHS Compliant=Yes, Series=FCSL, Technology="METAL FOIL", Termination=SMD/SMT, Tolerance=5%, Width=8.9mm
SW1 SW2 SW3: library part CMP-10040-000029-1, "SWITCH TACTILE SPST-NO 0.02A 15V", Current Rating=5A, Flammability Rating="UL94 V-0", Insulation Color=Black, Max Operating Temperature=85°C, Min Operating Temperature=-40°C, Operating Force=240gf, Actuator Type=Standard, Connector Type=USB, Contact Plating=Gold, Gender=Receptacle, Illumination Type=Non-Illuminated, Mechanical Life=500000Cycles, Mount="Surface Mount", Number of Contacts=24, Number of Ports=1, Packaging="Tape and Reel", Switch Function=Off-Mom, Switch Travel=0.13mm, Termination=Solder, Throw Configuration=SPST
U1_MOSFET_BANK_0 U1_MOSFET_BANK_1 U1_MOSFET_BANK_2 U1_MOSFET_BANK_3 U3_MOSFET_BANK_0 U3_MOSFET_BANK_1 U3_MOSFET_BANK_2 U3_MOSFET_BANK_3 U4_MOSFET_BANK_0 U4_MOSFET_BANK_1 U4_MOSFET_BANK_2 U4_MOSFET_BANK_3 U5_MOSFET_BANK_0 U5_MOSFET_BANK_1 U5_MOSFET_BANK_2 U5_MOSFET_BANK_3 U12_12V_REG_0 U12_12V_REG_1 U12_12V_REG_2 U15: library part CMP-1557-00012-2, "SENSOR CURRENT HALL 12.5A AC/DC", Case/Package=SOIC, Current Sensing=12.5A, Frequency=100kHz, Max Operating Temperature=125°C, Max Supply Current=5.5mA, Max Supply Voltage=5.5V, Min Operating Temperature=-40°C, Min Supply Voltage=3V, Operating Supply Voltage=3.3V, Package Quantity=1, Quiescent Current=4mA, -3db Bandwidth=100kHz, Accuracy=5%, Bandwidth=100kHz, Height=1.5mm, Length=4.9mm, Linearity=1%, Number Of Channels=1, Number of Pins=8, Packaging="Tape and Reel", Polarity=Bidirectional, REACH SVHC="No SVHC", Response Time=4.6us, RoHS Compliant=Yes, Sensitivity=110mV/A, Series=-, Width=3.9mm
U2_MOSFET_BANK_0 U2_MOSFET_BANK_1 U2_MOSFET_BANK_2 U2_MOSFET_BANK_3: library part CMP-1095-00041-1, "Smart High-Side Power Switch for Industrial Applications 4 Channels: 4 x 140 mOhm Status Feedback, 5.5 to 40 V Operating, -30 to 85 degC, PG-DSO-20-32, Reel, Green", Load Current (typ)="1.3Â A", Manufacturer=Infineon, Operating Voltage Range (max)="40 V", Operating Voltage Range (min)="5.5Â V", Channels=4, ComponentLink1Description="Manufacturer URL", ComponentLink1URL=http://www.infineon.com/, ComponentLink2Description=Datasheet, ComponentLink2URL=http://www.infineon.com/dgdl/ITS716G_DS11_20081002.pdf?folderId=db3a304412b407950112b408e8c90004&fileId=db3a304412b407950112b428c2cf3e6d, ComponentLink3Description="Package Specification", ComponentLink3URL=http://www.infineon.com/dgdl/BTS+4130QGA_DS10+_neu.pdf?folderId=db3a304314dca389011537739e37155f&fileId=db3a30431a5c32f2011a957932285680&sId=db3a30433d68e984013d7f42d6576278, DatasheetVersion="Rev. 1.1", Diagnostic=Digital, Green=TRUE, Halogen-free=available, IL (nom)min - all channels active="1.3Â A", IL (nom)min - one channel active="2.3Â A", IL (SC)="9 A", IL (SCp)="9 A", Mounting Technology="Surface Mount", PackageDescription="20-Pin Plastic (Green) Dual Small Outline Package, 12.7 x 7.5 mm Body, 1.27 mm Pitch", PackageReference=PG-DSO-20-32, PackageVersion=Mar-08, Packing=Reel, PartNumber=ITS716G, Ptot (max)="3.6Â W", RON (max) @ Tj max="280 mOhm", RON @ 25 degC="140 mOhm (max)", toff (max)="270 us", ton (max)="250 us"
U6_MOSFET_BANK_0 U6_MOSFET_BANK_1 U6_MOSFET_BANK_2 U6_MOSFET_BANK_3 U13: library part CMP-0054-00372-2, "8-Channel, 50 kSPS to 200 kSPS, 8-Bit A/D Converter, 16-pin TSSOP, Pb-Free", Manufacturer="National Semiconductor", PackageTopMarking=NSUZXYTT*88S022*CIMT, PowerWise=Y, Code_JEDEC=MO-153-AB, ComponentLink1Description="ADC088S022 Datasheet", ComponentLink1URL=http://www.national.com/ds/AD/ADC088S022.pdf, ComponentLink2Description="ADC088S022 Web Page", ComponentLink2URL=http://www.national.com/pf/AD/ADC088S022.html, ComponentLink3Description="MTC16 Package Page", ComponentLink3URL=http://www.national.com/packaging/folders/mtc16.html, CompType="ADC IC", DatasheetVersion=Feb-2010, PackageDescription="Molded TSSOP, Jedec, 5 x 4.4 x 0.9mm Body, 16 Lead, 0.65mm Pitch", PackageReference=MTC16, PackageVersion="revD, Jun-2003", PinCount=16, RevisionNote="Component URLs added", RoHS=Y
U7: library part CMP-1557-00015-2, "SENSOR CURRENT HALL 25A AC/DC", Case/Package=SOIC, Current Sensing=25A, Frequency=100kHz, Max Operating Temperature=125°C, Max Supply Current=5.5mA, Max Supply Voltage=5.5V, Min Operating Temperature=-40°C, Min Supply Voltage=3V, Operating Supply Voltage=3.3V, Package Quantity=1, Quiescent Current=4mA, -3db Bandwidth=100kHz, Accuracy=4%, Bandwidth=100kHz, Height=1.5mm, Length=4.9mm, Linearity=1%, Number Of Channels=1, Number of Pins=8, Packaging="Tape and Reel", Polarity=Bidirectional, REACH SVHC="No SVHC", Response Time=4.6us, RoHS Compliant=Yes, Sensitivity=55mV/A, Series=-, Width=3.9mm
U8: library part CMP-318-000000-2, "Automotive CAN FD transceiver with watchdog, bus diagnostics and partial networking via sele 14-SOT-23-THIN -40 to 150", Component Type=Standard, Design Item ID=CMP-015-00012-2, Pin Count=14, Source=TCAN1146DYYRQ1.SchLib
U9: library part CMP-12756-000009-1, "IC REG LINEAR 5V 150MA SOT89", Ambient Temperature Range High=+85°C, Ambient Temperature Range Low=-40°C, Dropout Voltage=1000mV, Manufacturer="Diodes Inc.", Max Junction Temp=+125°C, Max Supply Voltage=40V, Min Supply Voltage=3.3V, Nominal Supply Current=2.5-25uA, Output Current=150mA, Output Voltage=5V, Package=SOT89, Temperature="-40°C to +125°C", Automotive=No, Category=IC, ComponentLink2Description=Datasheet, ComponentLink2URL=https://www.diodes.com/assets/Datasheets/AP7381.pdf, Device Class L1="Integrated Circuits (ICs)", Device Class L2="Power Management ICs", Device Class L3="Voltage Regulators - Linear", Digikey Description="IC REG LINEAR 5V 150MA SOT89", Footprint Url=https://www.diodes.com/assets/Package-Files/SOT89.pdf, Height=1.6mm, Lead Free=Yes, Manufacturer Part Number=AP7381-50Y-13, Number of Outputs=1, Octopart=https://octopart.com/ap7381-50y-13-diodes+inc.-87775116, Output Type=Fixed, RoHS=TRUE, Temperature Range High=+125°C, Temperature Range Low=-40°C
U10: library part CMP-12105-000107-1, "IC MCU 32BIT 128KB FLASH 100LQFP"
U11_12V_REG_0 U11_12V_REG_1 U11_12V_REG_2: library part CMP-0069-00198-3, "SIMPLE SWITCHER® High Efficiency 5A Step-Down Voltage Regulator with Sync, 7-pin TO-263, Pb-Free", Manufacturer="Texas Instruments", PackageTopMarking=NSUZXYTTE#*LM2677S*-12, PowerWise=N, Code_JEDEC=MO-169-AC, ComponentLink1Description="Datasheet URL", ComponentLink1URL=http://www.ti.com/general/docs/lit/getliterature.tsp?genericPartNumber=LM2677&fileType=pdf, CompType=Switcher, PackageDescription="TO-263, Molded, .400 x .390 x .180in Body, 7 Lead, .050in Pitch, Surface Mount", PackageReference=KTW0007B, PinCount=7, RoHS=Y
U14: library part CMP-019-00051-1, "2.2-MHz wide-VIN, synchronous boost controller with output voltage tracking 20-VQFN -40 to 125"
U16: library part CMP-07117-000003-1, "IC EEPROM 256K SPI 20MHZ 8SOIC", Frequency=20MHz, Manufacturer="ON Semiconductor", Max Supply Voltage=5.5V, Min Supply Voltage=1.8V, Nominal Supply Current=2-4mA, Package=SOIC8, Temperature="-40°C to +85°C", Temperature Range High=+85°C, Temperature Range Low=-40°C, Automotive=No, Category=IC, ComponentLink2Description=Datasheet, ComponentLink2URL=https://www.onsemi.cn/PowerSolutions/document/CAT25256-D.PDF, Device Class L1="Integrated Circuits (ICs)", Device Class L2=Memory, Device Class L3=EEPROM, Digikey Description="IC EEPROM 256K SPI 20MHZ 8SOIC", Footprint Url=https://www.onsemi.com/pub/Collateral/751BD.PDF, Height=1.75mm, Interface=SPI, Ipc Land Pattern Name=SOIC127P600X155-8, Lead Free=Yes, Manufacturer Part Number=CAT25256VI-GT3, Memory Size=256Kbits, Memory Type=EEPROM, Mouser Description="EEPROM Serial-SPI 256K-bit 32K x 8 2.5V/3.3V/5V 8-Pin SOIC N T/R", Octopart=https://octopart.com/cat25256vi-gt3-on+semiconductor-10567745, RoHS=TRUE, Standoff Height=0.1mm
XF1 XF2 XF3 XF4 XF5 XF6: library part CMP-2000-05461-1, "FUSE HOLDER, PCB MOUNT, 500VAC, 20A, ROHS", Current Rating=30A, Manufacturer=Keystone-Electronics, Voltage=500V, Category=CircuitProtection, Contact Finish=TinNickel, Contact Material=Brass, Datasheet URL=http://datasheet.octopart.com/3557-2-Keystone-datasheet-15715937.pdf, Datasheet Version=Apr-13, Family=Fuseholders, For Use With/Related Products=ATC,ATO257,MINI897, Fuse Size="0.43\"Lx0.15\"Wx0.64\"H(10.92mmx3.81mmx16.25mm)", Fuse Type=Blade, Fuseholder Type=Block, Manufacturer URL=http://www.keyelco.com/, Mounting Type=PCB, Number of Circuits=1, Orientation=Vertical, Series=-, Termination Style=PCPin
Y1: library part CMP-27762-011708-1, "Crystal 48MHz ±20ppm 18pF SMD-4 3.2mm x 2.5mm", Case/Package=CSMD, ESR (Equivalent Series Resistance)=35R, Frequency=48MHz, Frequency Stability=50ppm, Frequency Tolerance=20ppm, Load Capacitance=18pF, Max Operating Temperature=70°C, Min Operating Temperature=-20°C, Operating Frequency="48 MHz", Package Quantity=1000, Resistor Type=Ceramic, Depth=2.5mm, Height=0.031inch, Lead Free="Lead Free", Length=3.2mm, Mount="Surface Mount", Number of Pins=4, Packaging="Tape and Reel", Radiation Hardening=No, REACH SVHC="No SVHC", RoHS Compliant=Yes, Series=ABM8, Series Resistance=35R, Termination=SMD/SMT, Tolerance=20ppm, Width=0.098inch
Y2: library part CMP-40224-000006-1, "CRYSTAL 32.7680KHZ 12.5PF SMD", Frequency=32.768kHz, Load Capacitance=12.5pF, Manufacturer="ECS International", Package=ECX-1210, Temperature="-40°C to +85°C", Temperature Range High=+85°C, Temperature Range Low=-40°C, Tolerance=20ppm, Automotive=No, Category=Crys, ComponentLink2Description=Datasheet, ComponentLink2URL=https://ecsxtal.com/store/pdf/ECX-1210.pdf, Device Class L1="Passive Components", Device Class L2="Crystals / Oscillators", Device Class L3=Crystals, Digikey Description="CRYSTAL 32.7680KHZ 12.5PF SMD", ESR=90kΩ, Height=0.5mm, Lead Free=Yes, Manufacturer Part Number=ECS-.327-12.5-1210-TR, Octopart=https://octopart.com/ecs-.327-12.5-1210-tr-ecs+international-81221340, RoHS=TRUE, Series=ECX-1210

## Free pads (board coordinates)
  round 5 hole 2.5: 2(4,4) 2(4,106) 2(166,4) 2(166,106)

## Via types
v1: diameter 0.5, hole 0.3, TOP SIG to BOT SIG, 181 vias
v2: diameter 0.5, hole 0.3, TOP SIG to BOT SIG, tented both sides, 4 vias

## Nets (pads, with @x,y where several pads share a name; then routed paths per layer and width w, separated by ;. In a path a pad name is that pad's centre, name@x,y a point inside that pad or via, vN(x,y) a via of type N, cw(c..) or ccw(c..) an arc to the next point about the centre after c; other vN are vias at no path point)
3V3: C1_MOSFET_BANK_0.1 C1_MOSFET_BANK_1.1 C1_MOSFET_BANK_2.1 C1_MOSFET_BANK_3.1 C2_MOSFET_BANK_0.1 C2_MOSFET_BANK_1.1 C2_MOSFET_BANK_2.1 C2_MOSFET_BANK_3.1 C3_MOSFET_BANK_0.1 C3_MOSFET_BANK_1.1 C3_MOSFET_BANK_2.1 C3_MOSFET_BANK_3.1 C4_MOSFET_BANK_0.1 C4_MOSFET_BANK_1.1 C4_MOSFET_BANK_2.1 C4_MOSFET_BANK_3.1 C5_MOSFET_BANK_0.1 C5_MOSFET_BANK_1.1 C5_MOSFET_BANK_2.1 C5_MOSFET_BANK_3.1 C8.1 C10.1 C22.2 C24.1 C25.1 C26.1 C27.1 C28.1 C29.1 C36.1 C37.1 C48_12V_REG_0.1 C48_12V_REG_1.1 C48_12V_REG_2.1 C49.1 C71.1 C77.1 D4.2 D4.3 D5.2 D5.3 FB1.1 J4.1 R7_MOSFET_BANK_0.2 R7_MOSFET_BANK_1.2 R7_MOSFET_BANK_2.2 R7_MOSFET_BANK_3.2 R8_MOSFET_BANK_0.2 R8_MOSFET_BANK_1.2 R8_MOSFET_BANK_2.2 R8_MOSFET_BANK_3.2 R9_MOSFET_BANK_0.2 R9_MOSFET_BANK_1.2 R9_MOSFET_BANK_2.2 R9_MOSFET_BANK_3.2 R11_MOSFET_BANK_0.2 R11_MOSFET_BANK_1.2 R11_MOSFET_BANK_2.2 R11_MOSFET_BANK_3.2 R16_MOSFET_BANK_0.1 R16_MOSFET_BANK_1.1 R16_MOSFET_BANK_2.1 R16_MOSFET_BANK_3.1 R26.2 R36.2 R38.2 R42.1 R50_12V_REG_0.1 R50_12V_REG_1.1 R50_12V_REG_2.1 R53.2 R60.1 R61.2 R62.2 R63.2 R64.2 R65.2 R66.2 R67.2 R68.2 R87.1 R89.2 SW2.2 U1_MOSFET_BANK_0.8 U1_MOSFET_BANK_1.8 U1_MOSFET_BANK_2.8 U1_MOSFET_BANK_3.8 U3_MOSFET_BANK_0.8 U3_MOSFET_BANK_1.8 U3_MOSFET_BANK_2.8 U3_MOSFET_BANK_3.8 U4_MOSFET_BANK_0.8 U4_MOSFET_BANK_1.8 U4_MOSFET_BANK_2.8 U4_MOSFET_BANK_3.8 U5_MOSFET_BANK_0.8 U5_MOSFET_BANK_1.8 U5_MOSFET_BANK_2.8 U5_MOSFET_BANK_3.8 U6_MOSFET_BANK_0.2 U6_MOSFET_BANK_1.2 U6_MOSFET_BANK_2.2 U6_MOSFET_BANK_3.2 U7.8 U8.5 U10.6 U10.11 U10.27 U10.50 U10.75 U10.100 U12_12V_REG_0.8 U12_12V_REG_1.8 U12_12V_REG_2.8 U13.2 U15.8 U16.8 | length 153
  TOP SIG w0.2: R87.1@167,10.65 166.925,10.65 166.221,11.354 166.221,12.604 166.338,12.721 166.764,12.721 167,12.957 C71.1@167,12.979
  TOP SIG w0.254: R8_MOSFET_BANK_0.2@4.5,56.85 4.575,56.85 5.204,57.479 9.796,57.479 10.425,56.85 R7_MOSFET_BANK_0.2@10.5,56.85 ; R8_MOSFET_BANK_1.2@30.5,56.85 30.575,56.85 31.204,57.479 35.796,57.479 36.425,56.85 R7_MOSFET_BANK_1.2@36.5,56.85 ; R8_MOSFET_BANK_2.2@56.5,56.85 56.575,56.85 57.204,57.479 61.796,57.479 62.425,56.85 R7_MOSFET_BANK_2.2@62.5,56.85 ; R8_MOSFET_BANK_3.2@82.5,56.85 82.575,56.85 83.204,57.479 87.796,57.479 88.425,56.85 R7_MOSFET_BANK_3.2@88.5,56.85
  TOP SIG w0.3: U6_MOSFET_BANK_0.2@22.125,66.3 22.135,66.29 22.135,65.54 22.674,65 24.021,65 ; R16_MOSFET_BANK_0.1@24.35,64 24.272,64.078 24.272,64.749 24.021,65 ; C5_MOSFET_BANK_0.1@24.521,65.5 24.5,65.5 24.314,65.314 24.314,65.292 24.021,65 ; C8.1@25.891,50.396 25.928,50.359 25.928,47.349 25.965,47.312 ; U6_MOSFET_BANK_1.2@48.125,66.3 48.135,66.29 48.135,65.54 48.674,65 50.021,65 ; R16_MOSFET_BANK_1.1@50.35,64 50.272,64.078 50.272,64.749 50.021,65 ; C5_MOSFET_BANK_1.1@50.521,65.5 50.5,65.5 50.314,65.314 50.314,65.292 50.021,65 ; U6_MOSFET_BANK_2.2@74.125,66.3 74.135,66.29 74.135,65.54 74.674,65 76.021,65 ; R16_MOSFET_BANK_2.1@76.35,64 76.272,64.078 76.272,64.749 76.021,65 ; C5_MOSFET_BANK_2.1@76.521,65.5 76.5,65.5 76.314,65.314 76.314,65.292 76.021,65 ; U10.11@86.925,-106 88.532,-106 88.696,-105.836 v1(88.75,-105.836) ; U10.6@86.925,-103.5 v1(88.75,-103.5) ; U10.100@88.5,-99.425 88.5,-100.946 88.75,-101.196 v1(88.75,-101.25) ; v1(88.75,-112.75) 88.75,-112.804 89,-113.054 U10.27@89,-114.575 ; U12_12V_REG_0.8@99,33.983 99.112,34.095 U12_12V_REG_0.8@99.184,34.095 ; U6_MOSFET_BANK_3.2@100.125,66.3 100.135,66.29 100.135,65.54 100.674,65 102.021,65 ; v1(100.25,-112.75) 100.25,-112.804 100.5,-113.054 U10.50@100.5,-114.575 ; v1(100.25,-101.25) 100.304,-101.25 100.554,-101 U10.75@102.075,-101 ; R16_MOSFET_BANK_3.1@102.35,64 102.272,64.078 102.272,64.749 102.021,65 ; C5_MOSFET_BANK_3.1@102.521,65.5 102.5,65.5 102.314,65.314 102.314,65.292 102.021,65 ; U12_12V_REG_2.8@106.5,83.983 106.612,84.095 U12_12V_REG_2.8@106.684,84.095 ; U12_12V_REG_1.8@138.5,83.983 138.612,84.095 U12_12V_REG_1.8@138.684,84.095 ; U15.8@164.316,12.905 166.926,12.905 C71.1@167,12.979
  TOP SIG w0.5: v1(3,78) 2.595,78.405 U1_MOSFET_BANK_0.8@2.595,79.816 2.595,82.095 3,82.5 C1_MOSFET_BANK_0.1@3.021,82.5 ; v1(9,78) 8.595,78.405 U3_MOSFET_BANK_0.8@8.595,79.816 8.595,82.095 9,82.5 C2_MOSFET_BANK_0.1@9.021,82.5 ; v1(15,78) 14.595,78.405 U4_MOSFET_BANK_0.8@14.595,79.816 14.595,82.095 15,82.5 C3_MOSFET_BANK_0.1@15.021,82.5 ; v1(21,78) 20.595,78.405 U5_MOSFET_BANK_0.8@20.595,79.816 20.595,82.095 21,82.5 C4_MOSFET_BANK_0.1@21.021,82.5 ; v1(29,78) 28.595,78.405 U1_MOSFET_BANK_1.8@28.595,79.816 28.595,82.095 29,82.5 C1_MOSFET_BANK_1.1@29.021,82.5 ; v1(35,78) 34.595,78.405 U3_MOSFET_BANK_1.8@34.595,79.816 34.595,82.095 35,82.5 C2_MOSFET_BANK_1.1@35.021,82.5 ; v1(41,78) 40.595,78.405 U4_MOSFET_BANK_1.8@40.595,79.816 40.595,82.095 41,82.5 C3_MOSFET_BANK_1.1@41.021,82.5 ; v1(47,78) 46.595,78.405 U5_MOSFET_BANK_1.8@46.595,79.816 46.595,82.095 47,82.5 C4_MOSFET_BANK_1.1@47.021,82.5 ; v1(55,78) 54.595,78.405 U1_MOSFET_BANK_2.8@54.595,79.816 54.595,82.095 55,82.5 C1_MOSFET_BANK_2.1@55.021,82.5 ; v1(61,78) 60.595,78.405 U3_MOSFET_BANK_2.8@60.595,79.816 60.595,82.095 61,82.5 C2_MOSFET_BANK_2.1@61.021,82.5 ; v1(67,78) 66.595,78.405 U4_MOSFET_BANK_2.8@66.595,79.816 66.595,82.095 67,82.5 C3_MOSFET_BANK_2.1@67.021,82.5 ; v1(73,78) 72.595,78.405 U5_MOSFET_BANK_2.8@72.595,79.816 72.595,82.095 73,82.5 C4_MOSFET_BANK_2.1@73.021,82.5 ; v1(81,78) 80.595,78.405 U1_MOSFET_BANK_3.8@80.595,79.816 80.595,82.095 81,82.5 C1_MOSFET_BANK_3.1@81.021,82.5 ; v1(87,78) 86.595,78.405 U3_MOSFET_BANK_3.8@86.595,79.816 86.595,82.095 87,82.5 C2_MOSFET_BANK_3.1@87.021,82.5 ; v1(93,78) 92.595,78.405 U4_MOSFET_BANK_3.8@92.595,79.816 92.595,82.095 93,82.5 C3_MOSFET_BANK_3.1@93.021,82.5 ; C48_12V_REG_0.1@99,31.979 U12_12V_REG_0.8@99,33.983 ; v1(99,78) 98.595,78.405 U5_MOSFET_BANK_3.8@98.595,79.816 98.595,82.095 99,82.5 C4_MOSFET_BANK_3.1@99.021,82.5 ; C48_12V_REG_2.1@106.5,81.979 U12_12V_REG_2.8@106.5,83.983 ; C48_12V_REG_1.1@138.5,81.979 U12_12V_REG_1.8@138.5,83.983
  BOT SIG w0.3: C25.1@88.75,-105.479 C24.1@90.25,-105.479 ; C37.1@88.75,-103.229 C36.1@90.25,-103.229
  other v1: 139.3,21.25
12V_FB_12V_REG_0: C43_12V_REG_0.2 C44_12V_REG_0.2 C45_12V_REG_0.2 C46_12V_REG_0.2 L2_12V_REG_0.2 R47_12V_REG_0.1 U11_12V_REG_0.6 U12_12V_REG_0.1 U12_12V_REG_0.2 | length 0.1
  TOP SIG w0.3: R47_12V_REG_0.1@103.5,32.15 R47_12V_REG_0.1@103.575,32.15
  other v1: 112.15,5.46
12V_FB_12V_REG_1: C43_12V_REG_1.2 C44_12V_REG_1.2 C45_12V_REG_1.2 C46_12V_REG_1.2 L2_12V_REG_1.2 R47_12V_REG_1.1 U11_12V_REG_1.6 U12_12V_REG_1.1 U12_12V_REG_1.2 | length 0.1
  TOP SIG w0.3: R47_12V_REG_1.1@143,82.15 R47_12V_REG_1.1@143.075,82.15
  other v1: 151.65,55.46
12V_FB_12V_REG_2: C43_12V_REG_2.2 C44_12V_REG_2.2 C45_12V_REG_2.2 C46_12V_REG_2.2 L2_12V_REG_2.2 R47_12V_REG_2.1 U11_12V_REG_2.6 U12_12V_REG_2.1 U12_12V_REG_2.2 | length 0.1
  TOP SIG w0.3: R47_12V_REG_2.1@111,82.15 R47_12V_REG_2.1@111.075,82.15
  other v1: 119.65,55.46
12V_LL_I_SENSE_12V_REG_0: R52_12V_REG_0.1
12V_LL_I_SENSE_12V_REG_1: R52_12V_REG_1.1
12V_LL_I_SENSE_12V_REG_2: R52_12V_REG_2.1
12V_LL_V_SENSE_12V_REG_0: R47_12V_REG_0.2 R49_12V_REG_0.1 | length 1.7
  TOP SIG w0.3: R49_12V_REG_0.1@103.5,29.15 R47_12V_REG_0.2@103.5,30.85
12V_LL_V_SENSE_12V_REG_1: R47_12V_REG_1.2 R49_12V_REG_1.1 | length 1.7
  TOP SIG w0.3: R49_12V_REG_1.1@143,79.15 R47_12V_REG_1.2@143,80.85
12V_LL_V_SENSE_12V_REG_2: R47_12V_REG_2.2 R49_12V_REG_2.1 | length 1.7
  TOP SIG w0.3: R49_12V_REG_2.1@111,79.15 R47_12V_REG_2.2@111,80.85
12V_OUT_12V_REG_0: U12_12V_REG_0.3 U12_12V_REG_0.4
12V_OUT_12V_REG_1: U12_12V_REG_1.3 U12_12V_REG_1.4
12V_OUT_12V_REG_2: U12_12V_REG_2.3 U12_12V_REG_2.4
ADC_IN0: R69.1 R77.2 U13.4
ADC_IN1: R70.1 R78.2 U13.5
ADC_IN2: R71.1 R79.2 U13.6
ADC_IN3: R72.1 R80.2 U13.7
ADC_IN4: R73.1 R81.2 U13.8
ADC_IN5: R74.1 R82.2 U13.9
ADC_IN6: R75.1 R83.2 U13.10
ADC_IN7: R76.1 R84.2 U13.11
ADC_MISO: U13.15
ADC_MISO_MOSFET_BANK_0: U6_MOSFET_BANK_0.15 U6_MOSFET_BANK_1.15 U6_MOSFET_BANK_2.15 U6_MOSFET_BANK_3.15
ADC_MOSI: U13.14
ADC_MOSI_MOSFET_BANK_0: U6_MOSFET_BANK_0.14 U6_MOSFET_BANK_1.14 U6_MOSFET_BANK_2.14 U6_MOSFET_BANK_3.14
ADC_nCS: U13.1
ADC_nCS_MOSFET_BANK_0: U6_MOSFET_BANK_0.1
ADC_nCS_MOSFET_BANK_1: U6_MOSFET_BANK_1.1
ADC_nCS_MOSFET_BANK_2: U6_MOSFET_BANK_2.1
ADC_nCS_MOSFET_BANK_3: U6_MOSFET_BANK_3.1
ADC_SCLK: U13.16
ADC_SCLK_MOSFET_BANK_0: U6_MOSFET_BANK_0.16 U6_MOSFET_BANK_1.16 U6_MOSFET_BANK_2.16 U6_MOSFET_BANK_3.16
AMP_36V: U15.3 U15.4
AMP_VCC: C67.1 C68.2 C69.1 C70.1 R85.1 U14.1 U14.8 XF2.3 XF2.4 | length 1.3
  TOP SIG w0.2: v1(135.25,22.5) 135.25,22.581 135.5,22.831 U14.1@135.5,23.725
BCM_VCC: U2_MOSFET_BANK_0.1 U2_MOSFET_BANK_0.10 U2_MOSFET_BANK_0.11 U2_MOSFET_BANK_0.12 U2_MOSFET_BANK_0.15 U2_MOSFET_BANK_0.16 U2_MOSFET_BANK_0.19 U2_MOSFET_BANK_0.20 U2_MOSFET_BANK_1.1 U2_MOSFET_BANK_1.10 U2_MOSFET_BANK_1.11 U2_MOSFET_BANK_1.12 U2_MOSFET_BANK_1.15 U2_MOSFET_BANK_1.16 U2_MOSFET_BANK_1.19 U2_MOSFET_BANK_1.20 U2_MOSFET_BANK_2.1 U2_MOSFET_BANK_2.10 U2_MOSFET_BANK_2.11 U2_MOSFET_BANK_2.12 U2_MOSFET_BANK_2.15 U2_MOSFET_BANK_2.16 U2_MOSFET_BANK_2.19 U2_MOSFET_BANK_2.20 U2_MOSFET_BANK_3.1 U2_MOSFET_BANK_3.10 U2_MOSFET_BANK_3.11 U2_MOSFET_BANK_3.12 U2_MOSFET_BANK_3.15 U2_MOSFET_BANK_3.16 U2_MOSFET_BANK_3.19 U2_MOSFET_BANK_3.20 XF6.3 XF6.4
BOOT: C22.1 R39.1 R41.2 U10.94
BST_REG_OUT: C52.2 C53.2 C54.2 C55.2 C56.2 C57.2 C58.2 C59.1 C60.1 C61.1 C62.1 C63.1 C64.1 C65.1 Q9.3 R93.1 U14.3 U15.1 U15.2 | length 8.9
  TOP SIG w0.2: R93.1@132,17.35 134.35,17.35 134.5,17.5 ; U14.3@136.5,23.725 136.5,20.75 137.025,20.225 138.025,20.225 138.975,19.275 138.975,19
CAN_INH: R30.1 U8.7
CAN_MISO: U8.6
CAN_MOSI: U8.11
CAN_N: C12.1 D3.1 J1.35 L1.4 R35.2
CAN_nCS: U8.14
CAN_P: C14.2 D3.2 J1.34 L1.1 R37.1
CAN_RX: U8.4
CAN_SCLK: U8.8
CAN_TX: U8.1
EXT_IN_0: F6_BYPASS_0.1 J1.20
EXT_IN_1: F6_BYPASS_1.1 J1.21